# Altium PCB MGMEZZ04.PcbDoc (part 9 of 9)
Units mil, origin at the board's own origin, x right, y up, seen from the top; angles counter-clockwise.
Board outline 3790 x 5472.44 mil, 10 copper layers (TopLayer, InternalPlane1, MidLayer1, InternalPlane2, MidLayer2, MidLayer3, InternalPlane3, MidLayer4, InternalPlane4, BottomLayer), stack 57.08 mil thick; 846 components, 745 nets, 3323 pads, 1906 vias.
Unrouted connection lines stored in the file: 128.
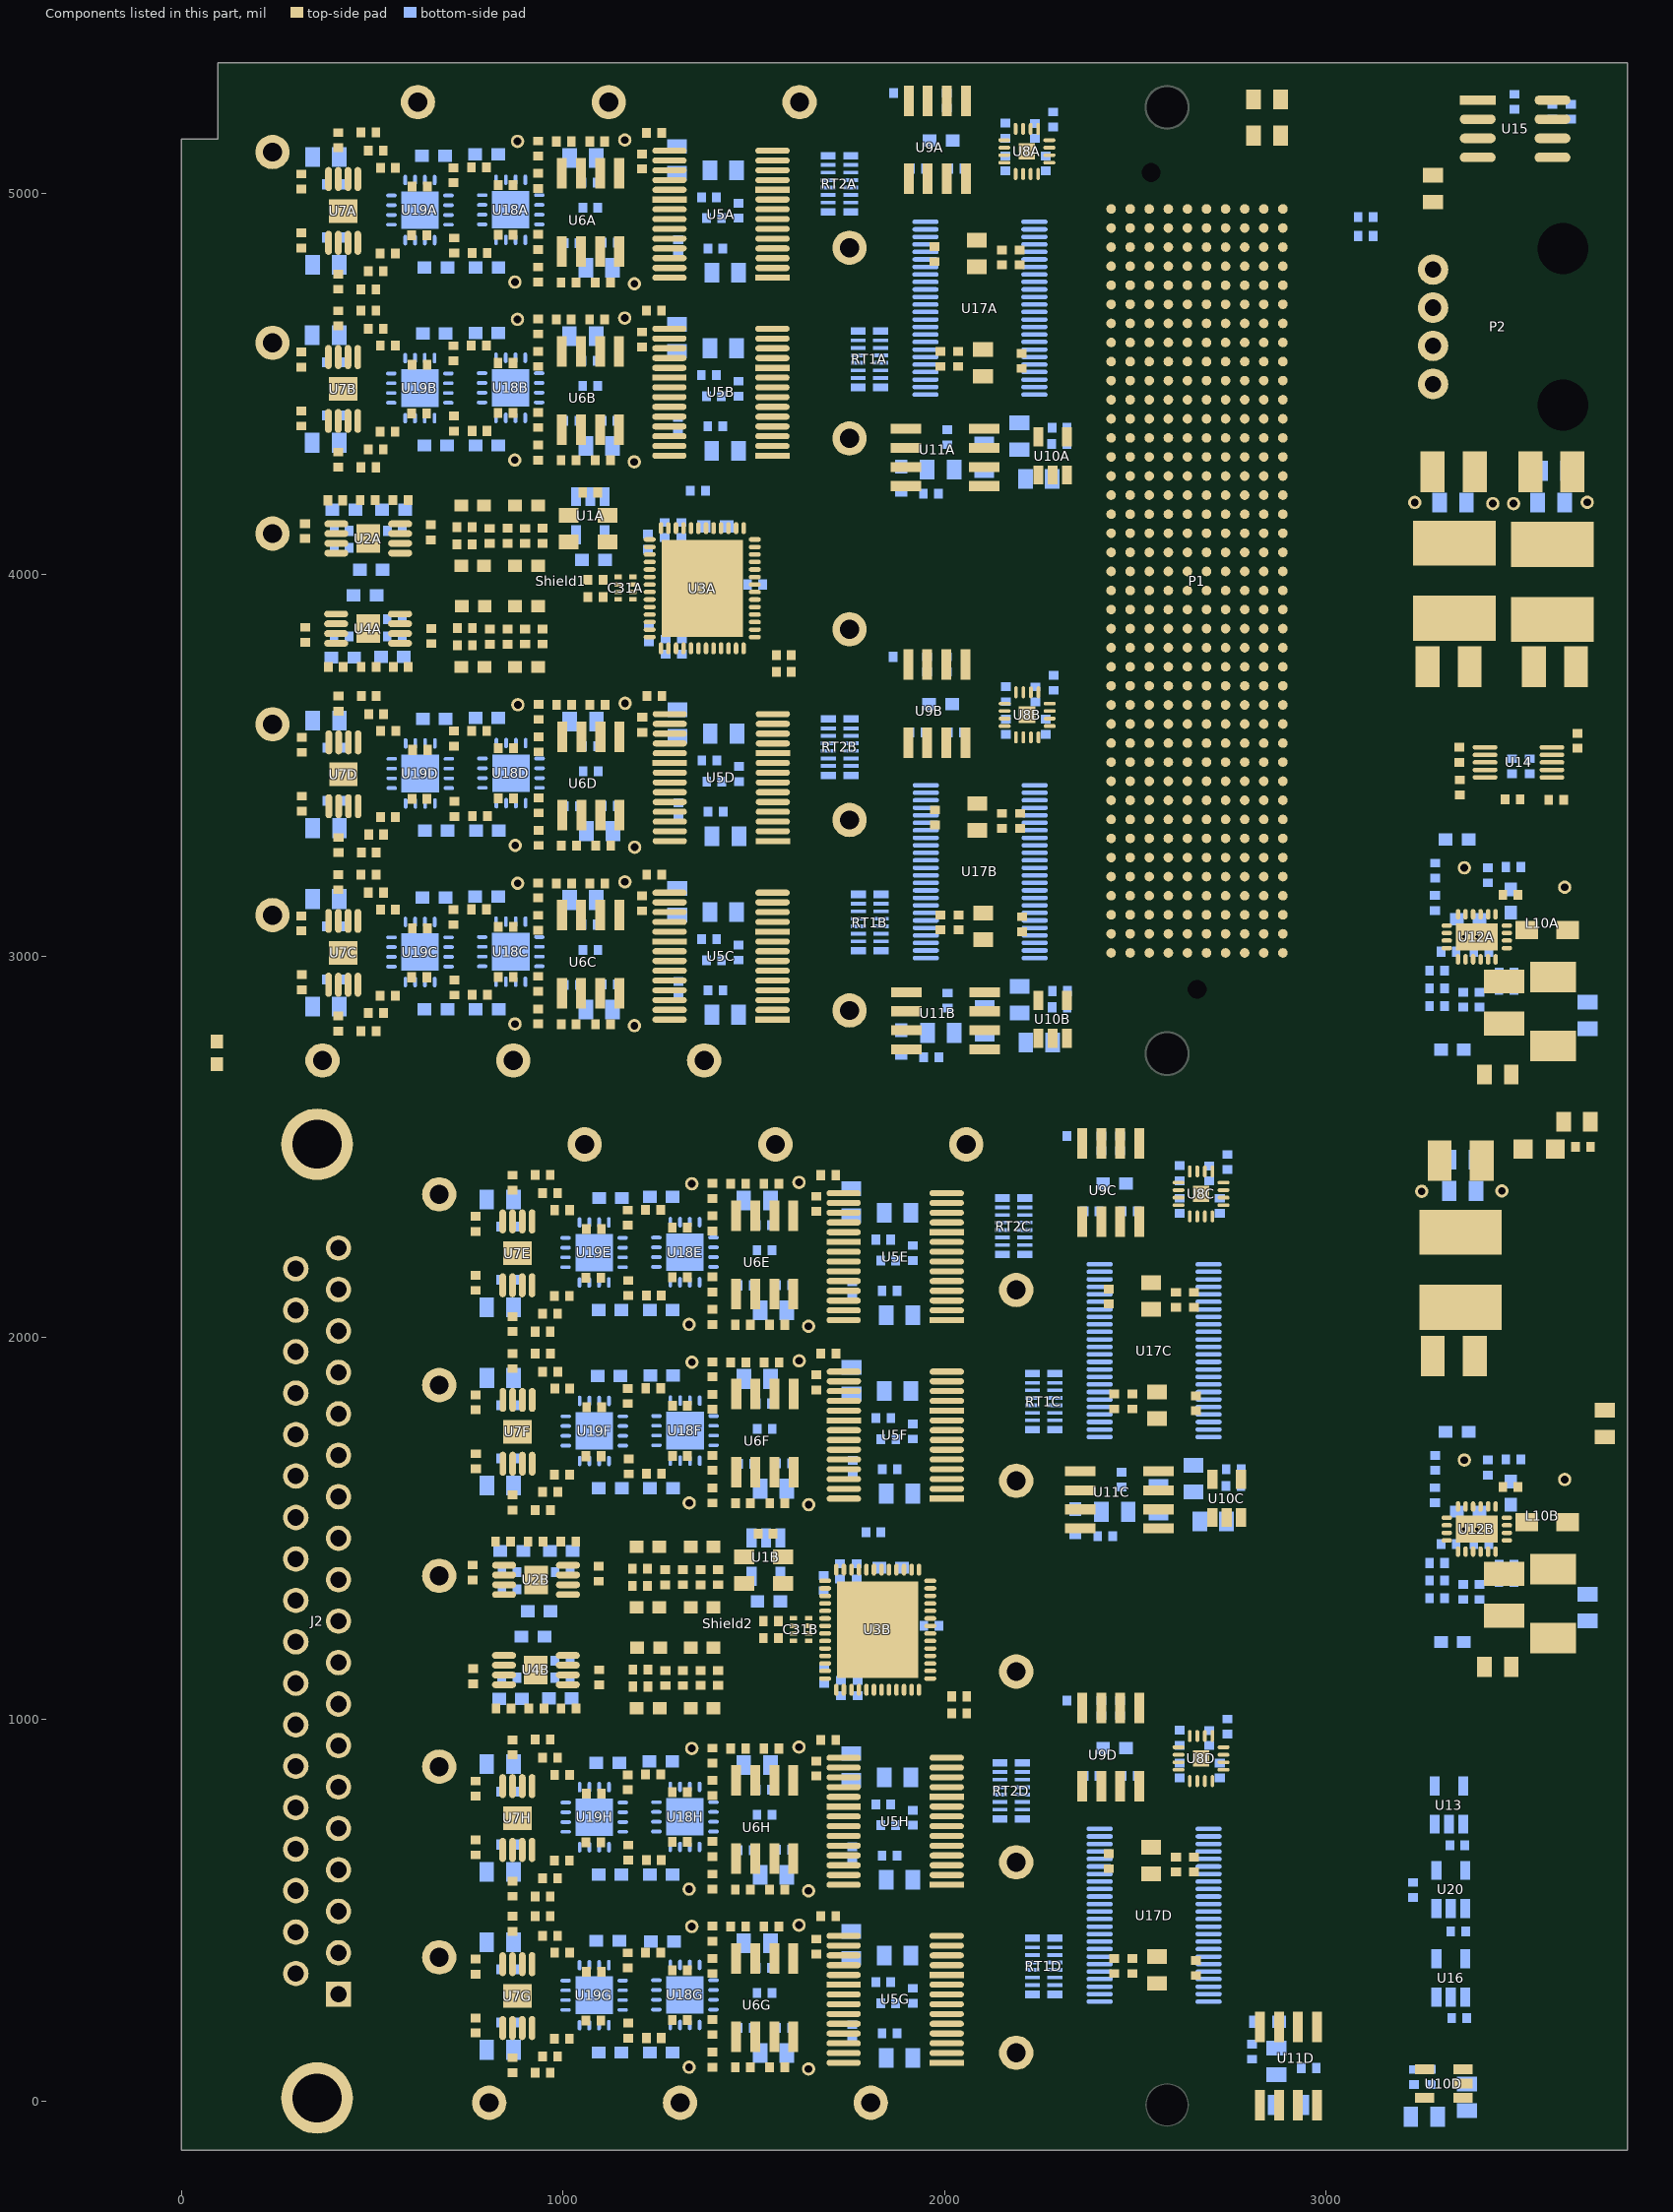
[diagram p17: the components of this part, seen from the top]

## Via types
v1: diameter 18, hole 8, TopLayer to BottomLayer, 1296 vias
v2: diameter 18, hole 8, TopLayer to BottomLayer, tented both sides, 203 vias
v3: diameter 19.68, hole 7.87, TopLayer to BottomLayer, 188 vias
v4: diameter 25, hole 15, TopLayer to BottomLayer, tented both sides, 99 vias
v5: diameter 25, hole 15, TopLayer to BottomLayer, 72 vias
v6: diameter 35, hole 20, TopLayer to BottomLayer, 48 vias

## Nets (pads, with @x,y where several pads share a name; then routed paths per layer and width w, separated by ;. In a path a pad name is that pad's centre, name@x,y a point inside that pad or via, vN(x,y) a via of type N, cw(c..) or ccw(c..) an arc to the next point about the centre after c; other vN are vias at no path point) (continued)
copper on no net: | length 3530.8
  TopLayer w6.5: v2(2411.34,3321.83) 2423.84,3321.83 2436.34,3309.33 ; v2(2411.34,3346.83) 2423.84,3346.83 2436.34,3359.33 ; v2(2411.34,3471.83) 2423.84,3471.83 2436.34,3459.33 ; v2(2411.34,3496.83) 2423.84,3496.83 2436.34,3509.33 ; v2(2411.34,3621.83) 2423.84,3621.83 2436.34,3609.33 ; v2(2411.34,3646.83) 2423.84,3646.83 2436.34,3659.33 ; v2(2411.34,3771.83) 2423.84,3771.83 2436.34,3759.33 ; v2(2411.34,3796.83) 2423.84,3796.83 2436.34,3809.33 ; v2(2411.34,3921.83) 2423.84,3921.83 2436.34,3909.33 ; v2(2411.34,3946.83) 2423.84,3946.83 2436.34,3959.33 ; v2(2411.34,4071.83) 2423.84,4071.83 2436.34,4059.33 ; v2(2411.34,4096.83) 2423.84,4096.83 2436.34,4109.33 ; v2(2411.34,4221.83) 2423.84,4221.83 2436.34,4209.33 ; v2(2411.34,4246.83) 2423.84,4246.83 2436.34,4259.33 ; v2(2411.34,4371.83) 2423.84,4371.83 2436.34,4359.33 ; v2(2411.34,4396.83) 2423.84,4396.83 2436.34,4409.33 ; v2(2411.34,4521.83) 2423.84,4521.83 2436.34,4509.33 ; v2(2411.34,4546.83) 2423.84,4546.83 2436.34,4559.33 ; v2(2411.34,4671.83) 2423.84,4671.83 2436.34,4659.33 ; v2(2411.34,4696.83) 2423.84,4696.83 2436.34,4709.33 ; v2(2411.34,4821.83) 2423.84,4821.83 2436.34,4809.33 ; v2(2411.34,4846.83) 2423.84,4846.83 2436.34,4859.33 ; v2(2461.34,3421.83) 2473.84,3421.83 2486.34,3409.33 ; v2(2461.34,3446.83) 2473.84,3446.83 2486.34,3459.33 ; v2(2461.34,3571.83) 2473.84,3571.83 2486.34,3559.33 ; v2(2461.34,3596.83) 2473.84,3596.83 2486.34,3609.33 ; v2(2461.34,3721.83) 2473.84,3721.83 2486.34,3709.33 ; v2(2461.34,3746.83) 2473.84,3746.83 2486.34,3759.33 ; v2(2461.34,3871.83) 2473.84,3871.83 2486.34,3859.33 ; v2(2461.34,3896.83) 2473.84,3896.83 2486.34,3909.33 ; v2(2461.34,4021.83) 2473.84,4021.83 2486.34,4009.33 ; v2(2461.34,4046.83) 2473.84,4046.83 2486.34,4059.33 ; v2(2461.34,4171.83) 2473.84,4171.83 2486.34,4159.33 ; v2(2461.34,4196.83) 2473.84,4196.83 2486.34,4209.33 ; v2(2461.34,4321.83) 2473.84,4321.83 2486.34,4309.33 ; v2(2461.34,4346.83) 2473.84,4346.83 2486.34,4359.33 ; v2(2461.34,4471.83) 2473.84,4471.83 2486.34,4459.33 ; v2(2461.34,4496.83) 2473.84,4496.83 2486.34,4509.33 ; v2(2461.34,4621.83) 2473.84,4621.83 2486.34,4609.33 ; v2(2461.34,4646.83) 2473.84,4646.83 2486.34,4659.33 ; 2486.34,3259.65 2486.5,3259.49 2498.84,3247.15 v2(2498.84,3234.65) ; v2(2611.34,3171.83) 2623.84,3171.83 2636.34,3159.33 ; v2(2611.34,3196.83) 2623.84,3196.83 2636.34,3209.33 ; v2(2611.34,3321.83) 2623.84,3321.83 2636.34,3309.33 ; v2(2611.34,3346.83) 2623.84,3346.83 2636.34,3359.33 ; v2(2611.34,3471.83) 2623.84,3471.83 2636.34,3459.33 ; v2(2611.34,3496.83) 2623.84,3496.83 2636.34,3509.33 ; v2(2611.34,3621.83) 2623.84,3621.83 2636.34,3609.33 ; v2(2611.34,3646.83) 2623.84,3646.83 2636.34,3659.33 ; v2(2611.34,3771.83) 2623.84,3771.83 2636.34,3759.33 ; v2(2611.34,3796.83) 2623.84,3796.83 2636.34,3809.33 ; v2(2611.34,3921.83) 2623.84,3921.83 2636.34,3909.33 ; v2(2611.34,3946.83) 2623.84,3946.83 2636.34,3959.33 ; v2(2611.34,4071.83) 2623.84,4071.83 2636.34,4059.33 ; v2(2611.34,4096.83) 2623.84,4096.83 2636.34,4109.33 ; v2(2611.34,4221.83) 2623.84,4221.83 2636.34,4209.33 ; v2(2611.34,4246.83) 2623.84,4246.83 2636.34,4259.33 ; v2(2611.34,4371.83) 2623.84,4371.83 2636.34,4359.33 ; v2(2611.34,4396.83) 2623.84,4396.83 2636.34,4409.33 ; v2(2611.34,4521.83) 2623.84,4521.83 2636.34,4509.33 ; v2(2611.34,4546.83) 2623.84,4546.83 2636.34,4559.33 ; v2(2611.34,4671.83) 2623.84,4671.83 2636.34,4659.33 ; v2(2611.34,4696.83) 2623.84,4696.83 2636.34,4709.33 ; v2(2661.34,3071.83) 2673.84,3071.83 2686.34,3059.33 ; v2(2661.34,3096.83) 2673.84,3096.83 2686.34,3109.33 ; v2(2661.34,3271.83) 2673.84,3271.83 2686.34,3259.33 ; v2(2661.34,3296.83) 2673.84,3296.83 2686.34,3309.33 ; v2(2661.34,3421.83) 2673.84,3421.83 2686.34,3409.33 ; v2(2661.34,3446.83) 2673.84,3446.83 2686.34,3459.33 ; v2(2661.34,3571.83) 2673.84,3571.83 2686.34,3559.33 ; v2(2661.34,3596.83) 2673.84,3596.83 2686.34,3609.33 ; v2(2661.34,3721.83) 2673.84,3721.83 2686.34,3709.33 ; v2(2661.34,3746.83) 2673.84,3746.83 2686.34,3759.33 ; v2(2661.34,3871.83) 2673.84,3871.83 2686.34,3859.33 ; v2(2661.34,3896.83) 2673.84,3896.83 2686.34,3909.33 ; v2(2661.34,4021.83) 2673.84,4021.83 2686.34,4009.33 ; v2(2661.34,4046.83) 2673.84,4046.83 2686.34,4059.33 ; v2(2661.34,4171.83) 2673.84,4171.83 2686.34,4159.33 ; v2(2661.34,4196.83) 2673.84,4196.83 2686.34,4209.33 ; v2(2661.34,4321.83) 2673.84,4321.83 2686.34,4309.33 ; v2(2661.34,4346.83) 2673.84,4346.83 2686.34,4359.33 ; v2(2661.34,4471.83) 2673.84,4471.83 2686.34,4459.33 ; v2(2661.34,4496.83) 2673.84,4496.83 2686.34,4509.33 ; v2(2661.34,4621.83) 2673.84,4621.83 2686.34,4609.33 ; v2(2661.34,4646.83) 2673.84,4646.83 2686.34,4659.33 ; v2(2811.34,3571.83) 2823.84,3571.83 2836.34,3559.33 ; v2(2811.34,3596.83) 2823.84,3596.83 2836.34,3609.33 ; v2(2811.34,3771.83) 2823.84,3771.83 2836.34,3759.33 ; v2(2811.34,3796.83) 2823.84,3796.83 2836.34,3809.33 ; v2(2811.34,3971.83) 2823.84,3971.83 2836.34,3959.33 ; v2(2811.34,3996.83) 2823.84,3996.83 2836.34,4009.33 ; v2(2811.34,4371.83) 2823.84,4371.83 2836.34,4359.33 ; v2(2811.34,4396.83) 2823.84,4396.83 2836.34,4409.33 ; v2(2811.34,4571.83) 2823.84,4571.83 2836.34,4559.33 ; v2(2811.34,4596.83) 2823.84,4596.83 2836.34,4609.33 ; v2(2811.34,4771.83) 2823.84,4771.83 2836.34,4759.33 ; v2(2811.34,4796.83) 2823.84,4796.83 2836.34,4809.33 ; v2(2861.34,3071.83) 2873.84,3071.83 2886.34,3059.33 ; v2(2861.34,3096.83) 2873.84,3096.83 2886.34,3109.33 ; v2(2861.34,3271.83) 2873.84,3271.83 2886.34,3259.33 ; v2(2861.34,3296.83) 2873.84,3296.83 2886.34,3309.33 ; v2(2861.34,3471.83) 2873.84,3471.83 2886.34,3459.33 ; v2(2861.34,3496.83) 2873.84,3496.83 2886.34,3509.33 ; v2(2861.34,3671.83) 2873.84,3671.83 2886.34,3659.33 ; v2(2861.34,3696.83) 2873.84,3696.83 2886.34,3709.33 ; v2(2861.34,3871.83) 2873.84,3871.83 2886.34,3859.33 ; v2(2861.34,3896.83) 2873.84,3896.83 2886.34,3909.33 ; v2(2861.34,4071.83) 2873.84,4071.83 2886.34,4059.33 ; v2(2861.34,4096.83) 2873.84,4096.83 2886.34,4109.33 ; v2(2861.34,4271.83) 2873.84,4271.83 2886.34,4259.33 ; v2(2861.34,4296.83) 2873.84,4296.83 2886.34,4309.33 ; v2(2861.34,4471.83) 2873.84,4471.83 2886.34,4459.33 ; v2(2861.34,4496.83) 2873.84,4496.83 2886.34,4509.33 ; v2(2861.34,4671.83) 2873.84,4671.83 2886.34,4659.33 ; v2(2861.34,4696.83) 2873.84,4696.83 2886.34,4709.33 ; v2(2861.34,4871.83) 2873.84,4871.83 2886.34,4859.33 ; v2(2861.34,4896.83) 2873.84,4896.83 2886.34,4909.33
  other v1: 95,4175
  other v2: 2861.34,4171.83 2861.34,4196.83

## Polygon pours and split planes (outlines as drawn)
P1V8B on MidLayer4 "MidLayer4-No Net 1" (solid, pour order 5): 1506.77,1467.18 1506.77,1009.22 1764.69,1009.22 1768.56,1009.22 1789.69,1030.35 1790.82,1029.22 1939.69,1029.22 1966.91,1029.22 2044.69,1107 2039.69,1112 2039.69,1467.18 1507.21,1467.18
P1V8A on MidLayer4 "MidLayer4-No Net 1" (solid, pour order 6): 1047.08,4196.83 1047.08,3738.87 1305,3738.87 1308.87,3738.87 1330,3760 1331.13,3758.87 1480,3758.87 1507.23,3758.87 1585,3836.65 1580,3841.65 1580,4196.83 1047.52,4196.83
VLOWERRAILB on MidLayer1 "MidLayer4-No Net 1" (solid, pour order 7): 3235,1797.62 3710,1797.62 3710,1057.62 3235,1057.62 3235,1797.62
VLOWERRAILA on MidLayer1 "MidLayer4-No Net 1" (solid, pour order 8): 3235,3350 3710,3350 3710,2610 3235,2610 3235,3350
GND on InternalPlane4 (split plane): 3769.9,-109.82 1066.93,-109.82 20.1,-109.82 20.1,5121.9 96,5121.9 99.92,5122.29 103.69,5123.43 107.17,5125.29 110.21,5127.79 112.71,5130.83 114.57,5134.31 115.71,5138.08 116.1,5142 116.1,5322.42 3769.9,5322.42
VDD2B on InternalPlane3 (split plane): 2636.94,1240 2637.17,1238.83 2637.84,1237.84 2861.94,1013.73 2861.94,550 2862.17,548.83 2862.84,547.84 3092.84,317.84 3093.73,316.95 3291.94,118.73 3291.94,-109.82 1066.93,-109.82 20.1,-109.82 20.1,1243.29 2636.94,1243.29
VDD1B on InternalPlane3 (split plane): 2846.94,2514.05 2846.94,1611.27 2786.2,1550.53 2677.47,1550.53 2676.3,1550.29 2675.3,1549.63 2637.84,1512.16 2637.17,1511.17 2636.94,1510 2636.94,1400 2636.94,1249.41 20.1,1249.41 20.1,2646.94 2714.05,2646.94
P5V5FILT on InternalPlane3 (split plane): 3769.9,-109.82 3298.06,-109.82 3298.06,120 3297.83,121.17 3297.16,122.16 3098.05,321.27 3097.16,322.16 2868.06,551.27 2868.06,1015 2867.83,1016.17 2867.16,1017.16 2643.06,1241.27 2643.06,1246.35 2643.06,1400 2643.06,1508.73 2678.73,1544.41 2787.47,1544.41 2788.64,1544.64 2789.63,1545.3 2852.16,1607.84 2852.83,1608.83 2853.06,1610 2853.06,2515.32 2852.83,2516.49 2852.16,2517.48 2717.48,2652.16 2716.49,2652.83 2715.32,2653.06 2178.06,2653.06 2178.06,2770.96 2304.04,2896.94 2375,2896.94 2376.17,2897.17 2377.16,2897.84 2377.83,2898.83 2378.06,2900 2378.06,3680 2377.83,3681.17 2377.16,3682.16 2082.5,3976.83 2081.51,3977.49 2080.34,3977.72 1973.4,3977.72 1973.4,4034.07 2232.25,4292.93 2300.37,4292.93 2301.54,4293.16 2302.53,4293.82 2367.16,4358.45 2367.83,4359.45 2368.06,4360.62 2368.06,5322.42 3769.9,5322.42
VDD1A on InternalPlane3 (split plane): 2361.94,4361.88 2299.1,4299.05 2230.99,4299.05 2229.82,4298.81 2228.82,4298.15 1968.17,4037.5 1967.51,4036.51 1967.28,4035.34 1967.28,3977.72 663.96,3977.72 663.66,3978.16 662.67,3978.83 661.5,3979.06 660.77,3979.06 657.66,3982.16 656.67,3982.83 655.5,3983.06 654.33,3982.83 653.34,3982.16 652.68,3981.17 652.44,3980 652.63,3979.06 20.1,3979.06 20.1,5121.9 96,5121.9 99.92,5122.29 103.69,5123.43 107.17,5125.29 110.21,5127.79 112.71,5130.83 114.57,5134.31 115.71,5138.08 116.1,5142 116.1,5322.42 2361.94,5322.42
VDD2A on InternalPlane3 (split plane): 658.9,3972.28 659.89,3971.62 661.06,3971.38 662.23,3971.62 662.43,3971.75 663.16,3971.6 2079.07,3971.6 2371.94,3678.73 2371.94,2903.06 2302.78,2903.06 2301.61,2902.83 2300.61,2902.16 2172.84,2774.39 2172.17,2773.39 2171.94,2772.22 2171.94,2653.06 20.1,2653.06 20.1,3972.94 658.24,3972.94
VSS2B on InternalPlane2 (split plane): 2546.94,1135.74 2546.94,258.27 2547.17,257.1 2547.84,256.1 2571.1,232.84 2572.1,232.17 2573.27,231.94 2745,231.94 2746.17,232.17 2747.16,232.84 2816.27,301.94 2902.36,301.94 2926.59,277.72 2926.59,220.91 2873.98,168.3 2873.32,167.31 2873.08,166.14 2873.08,68.86 2873.32,67.69 2873.98,66.7 2951.94,-11.27 2951.94,-109.82 1066.93,-109.82 20.1,-109.82 20.1,1243.29 2439.39,1243.29
VSS1B on InternalPlane2 (split plane): 2296.89,2641.17 2298.06,2640.94 2489.73,2640.94 2536.94,2593.73 2536.94,1762.43 2497.57,1723.06 2370.17,1723.06 2368.99,1722.83 2368,1722.16 2337.84,1692 2337.17,1691.01 2336.94,1689.83 2336.94,1610 2337.17,1608.83 2337.84,1607.84 2406.05,1539.63 2406.21,1538.83 2406.87,1537.84 2416.94,1527.76 2416.94,1420 2416.94,1249.41 20.1,1249.41 20.1,2640.94 2295,2640.94 2296.17,2641.17 2296.53,2641.41
N5V5FILT on InternalPlane2 (split plane): 3769.9,-109.82 2958.06,-109.82 2958.06,-10 2957.83,-8.83 2957.16,-7.84 2879.2,70.12 2879.2,164.87 2931.81,217.48 2932.47,218.48 2932.71,219.65 2932.71,278.98 2932.47,280.15 2931.81,281.15 2905.79,307.16 2904.8,307.83 2903.63,308.06 2815,308.06 2813.83,307.83 2812.84,307.16 2743.73,238.06 2574.53,238.06 2553.06,259.53 2553.06,1137.01 2552.83,1138.18 2552.16,1139.17 2442.82,1248.52 2441.83,1249.18 2440.66,1249.41 2423.06,1249.41 2423.06,1420 2423.06,1529.03 2422.83,1530.2 2422.16,1531.19 2412.02,1541.34 2411.86,1542.14 2411.19,1543.13 2343.06,1611.27 2343.06,1688.57 2371.43,1716.94 2498.84,1716.94 2500.01,1717.17 2501,1717.84 2542.16,1759 2542.83,1759.99 2543.06,1761.16 2543.06,2595 2542.83,2596.17 2542.16,2597.16 2493.16,2646.16 2492.17,2646.83 2491,2647.06 2298.06,2647.06 2296.89,2646.83 2296.53,2646.59 2296.17,2646.83 2295,2647.06 1943.06,2647.06 1943.06,2819.9 1946,2822.84 1946.66,2823.83 1946.89,2825 1946.66,2826.17 1946,2827.16 1945,2827.83 1943.83,2828.06 1911.27,2828.06 1888.06,2851.27 1888.06,2956.94 2018.53,2956.94 2019.7,2957.17 2020.7,2957.84 2026.35,2963.49 2027.01,2964.48 2027.24,2965.65 2027.24,3487.57 2027.24,3487.92 2096.67,3557.34 2097.33,3558.33 2097.56,3559.5 2097.56,3850.5 2097.33,3851.67 2096.67,3852.66 1971.05,3978.27 2023.52,4030.74 2024.19,4031.74 2024.42,4032.91 2024.42,4239.46 2024.19,4240.63 2023.52,4241.62 1956.04,4309.1 1955.04,4309.77 1953.87,4310 1935.31,4310 1933.15,4312.16 1932.16,4312.83 1930.99,4313.06 1896.27,4313.06 1838.06,4371.27 1838.06,4418.73 1864.94,4445.61 2032.15,4445.61 2033.33,4445.84 2034.32,4446.51 2072.56,4484.75 2073.23,4485.75 2073.46,4486.92 2073.46,5322.42 3769.9,5322.42
VSS1A on InternalPlane2 (split plane): 2067.34,4488.18 2030.89,4451.73 1863.67,4451.73 1862.5,4451.5 1861.51,4450.83 1832.84,4422.16 1832.17,4421.17 1831.94,4420 1831.94,4370 1832.17,4368.83 1832.84,4367.84 1892.84,4307.84 1893.83,4307.17 1895,4306.94 1926.66,4306.94 1926.89,4305.77 1927.56,4304.78 1928.55,4304.12 1929.72,4303.88 1932.78,4303.88 1942.84,4293.82 1943.83,4293.16 1945,4292.93 1946.17,4293.16 1947.16,4293.82 1947.83,4294.82 1948.06,4295.99 1947.83,4297.16 1947.16,4298.15 1941.43,4303.88 1952.61,4303.88 2018.3,4238.19 2018.3,4034.17 1963.18,3979.06 20.1,3979.06 20.1,5121.9 96,5121.9 99.92,5122.29 103.69,5123.43 107.17,5125.29 110.21,5127.79 112.71,5130.83 114.57,5134.31 115.71,5138.08 116.1,5142 116.1,5322.42 2067.34,5322.42
VSS2A on InternalPlane2 (split plane): 2091.45,3849.23 2091.45,3560.77 2022.02,3491.35 2021.36,3490.36 2021.13,3489.19 2021.13,3488.43 2021.13,3487.57 2021.13,3485 2021.13,2966.92 2017.27,2963.06 1885,2963.06 1883.83,2962.83 1882.84,2962.16 1882.17,2961.17 1881.94,2960 1881.94,2850 1882.17,2848.83 1882.84,2847.84 1907.84,2822.84 1908.83,2822.17 1910,2821.94 1937.1,2821.94 1936.94,2821.17 1936.94,2647.06 20.1,2647.06 20.1,3972.94 1964.45,3972.94 1965.62,3973.17 1966.61,3973.84 1966.73,3973.95
GND on InternalPlane1 (split plane): 3769.9,-109.82 1066.93,-109.82 20.1,-109.82 20.1,5121.9 96,5121.9 99.92,5122.29 103.69,5123.43 107.17,5125.29 110.21,5127.79 112.71,5130.83 114.57,5134.31 115.71,5138.08 116.1,5142 116.1,5322.42 3769.9,5322.42

## Keep-outs
TopLayer:
  region: 2582.68,5110.24 cw(c2582.68,5224.41) 2468.5,5224.41 cw(c2582.68,5224.41) 2582.68,5338.58 cw(c2582.68,5224.41) 2696.85,5224.41 cw(c2582.68,5224.41)
  region: 2582.68,-125.98 cw(c2582.68,-11.81) 2468.5,-11.81 cw(c2582.68,-11.81) 2582.68,102.36 cw(c2582.68,-11.81) 2696.85,-11.81 cw(c2582.68,-11.81)
  region: 2582.68,2629.92 cw(c2582.68,2744.09) 2468.5,2744.09 cw(c2582.68,2744.09) 2582.68,2858.27 cw(c2582.68,2744.09) 2696.85,2744.09 cw(c2582.68,2744.09)

## Other copper
TopLayer:
  region net NetC56B_1: 3523,1395.63 3523,1458 3418.99,1458 3418.99,1395.63
  rectangle net NetC57B_1: 3462.99,1502.26 3520,1540.3
  rectangle net NetC57A_1: 3462.99,3054.64 3520,3092.68
  region net NetC56A_1: 3525.99,2948.01 3525.99,3009.02 3418.99,3009.02 3418.99,2948.01
  region net NetC31A_4: 1168.11,3961.05 1169.11,3963.05 1174.11,3958.05 1174.11,3953.05 1169.11,3948.05 1168.11,3950.05
  region net NetC31A_2: 1116.11,3974.05 1119.11,3971.05 1125.11,3963.05 1125.11,3986.05 1126.11,3986.05 1129.17,3988.05 1135.11,3989.05 1135.11,4000.05 1116.11,4000.05
  region net NetC31A_4: 1135.11,3930.05 1116.11,3930.05 1116.11,3954.05 1128.11,3941.05 1135.11,3941.05
  text "L1 (TOP) .GTL" at -1680,3894 h100
MidLayer1:
  text "L3 (ML1) .G1" at -1680,3344 h100
MidLayer2:
  text "L5 (ML2) .G2" at -1680,2764 h100
MidLayer3:
  text "L6 (ML3) .G3" at -1680,2464 h100
MidLayer4:
  text "L8 (ML4) .G4" at -1680,1824 h100
BottomLayer:
  text "L10 (BOT) .GBL" at -640,1174 h100
InternalPlane1 (plane layer: these items are gaps in the copper):
  lines w6: 274.75,4253.34 1643.75,4253.34 ; 275,3243 1644,3243 ; 275,3710 1644,3710 ; 275,3989.31 1644,3989.31 ; 275,4720 1644,4720 ; 275.2,2775.37 1644.2,2775.37 ; 278,5192 1647,5192 ; 728.82,991 2097.82,991 ; 729,2455 2098,2455 ; 731.5,44.98 2100.5,44.98 ; 731.5,507.69 2100.5,507.69 ; 731.5,1987.69 2100.5,1987.69 ; 731.89,1519.98 2100.89,1519.98
  text "L2 (GND) .GP1" at -1680,3704 h100
  text "GND" at -1430,3534 h100
InternalPlane2 (plane layer: these items are gaps in the copper):
  lines w6: 1,1246.35 1121.52,1246.35 ; 15,2644 2015,2644 2295,2644 ; 15,3976 661.5,3976 ; 275,3710 1644,3710 ; 275,4255 1644,4255 ; 275,4720 1644,4720 ; 275.2,2775.37 1644.2,2775.37 ; 275.81,3243.34 1644.81,3243.34 ; 278,5192 1647,5192 ; 645,3976 1964.45,3976 2021.36,4032.91 2021.36,4239.46 1953.87,4306.94 1929.72,4306.94 ; 728,2455 2097,2455 ; 728.82,991 2097.82,991 ; 730,1520 2099,1520 ; 731.5,44.98 2100.5,44.98 ; 731.5,507.69 2100.5,507.69 ; 731.5,1987.69 2100.5,1987.69 ; 1110,1246.35 2420,1246.35 ; 1940,2644 1940,2821.17 1943.83,2825 1910,2825 1885,2850 1885,2960 1920,2960 2018.53,2960 2024.19,2965.65 2024.19,3487.57 2024.19,3488.43 ; 1945,4220 1945,4230 ; 1945,4295.99 1930.99,4310 1895,4310 1835,4370 1835,4420 1863.67,4448.67 2032.15,4448.67 2070.4,4486.92 2070.4,5339.9 ; 1968.26,3976.74 2094.5,3850.5 2094.5,3559.5 2024.19,3489.19 2024.19,3485 ; 2295,1547.47 2302.47,1540 ; 2298.06,2644 2491,2644 2540,2595 2540,1761.16 2498.84,1720 2370.17,1720 2340,1689.83 2340,1610 2409.03,1540.97 2409.03,1540 2420,1529.03 2420,1420 2420,1246.35 ; 2955,-129.92 2955,-10 2876.14,68.86 2876.14,166.14 2929.65,219.65 2929.65,278.98 2903.63,305 2890,305 2815,305 2745,235 2573.27,235 2550,258.27 2550,1137.01 2440.66,1246.35 2420,1246.35
  text "L4 (PWR) .GP2" at -1680,3144 h100
  text "-5V5 & -5V" at -1440,2954 h100
InternalPlane3 (plane layer: these items are gaps in the copper):
  lines w6: 1,1246.35 2629.35,1246.35 ; 15,2650 2295,2650 ; 15,3976 661.5,3976 ; 274,5192 1643,5192 ; 274.75,4253.34 1643.75,4253.34 ; 275,3710 1644,3710 ; 275,4720 1644,4720 ; 275.2,2775.37 1644.2,2775.37 ; 275.81,3243.34 1644.81,3243.34 ; 655.5,3980 661.06,3974.44 ; 663.16,3974.66 1970.34,3974.66 ; 728.82,991 2097.82,991 ; 728.82,1987 2097.82,1987 ; 730,2455 2099,2455 ; 731.5,44.98 2100.5,44.98 ; 731.5,507.69 2100.5,507.69 ; 731.89,1519.98 2100.89,1519.98 ; 2175,2650 2175,2772.22 2302.78,2900 2375,2900 2375,3680 2080.34,3974.66 1970.34,3974.66 ; 2280,2650 2715.32,2650 2850,2515.32 2850,1610 2787.47,1547.47 2677.47,1547.47 2640,1510 2640,1400 2640,1246.35 ; 2365,5342.52 2365,4360.62 2300.37,4295.99 2230.99,4295.99 1970.34,4035.34 1970.34,3974.66 ; 2580,1246.35 2640,1246.35 ; 3295,-129.92 3295,120 3095.89,319.11 3095,320 2865,550 2865,1015 2640,1240 2640,1246.35
  text "5V5 & 5V" at -1550,2234 h100
  text "L7 (PWR) .GP3" at -1680,2034 h100
InternalPlane4 (plane layer: these items are gaps in the copper):
  lines w6: 274.75,4253.34 1643.75,4253.34 ; 275,3243 1644,3243 ; 275,3710 1644,3710 ; 275,4720 1644,4720 ; 275.2,2775.37 1644.2,2775.37 ; 278,5192 1647,5192 ; 728.82,508 2097.82,508 ; 728.82,991 2097.82,991 ; 728.82,1987 2097.82,1987 ; 729,2455 2098,2455 ; 731.5,44.98 2100.5,44.98 ; 731.89,1519.98 2100.89,1519.98
  text "FMC GND" at -1490,1594 h100
  text "L9 (GND) .GP4" at -1680,1414 h100

## Silkscreen, mask and mechanical layers (free items; w line width, h text height)
Outline:
  lines w3.94: 0,5142 0,-129.92 1066.93,-129.92 3011.81,-129.92 3790,-129.92 3790,5342.52 96,5342.52
  lines w4: 0,5142 96,5142 96,5342.52
Mechanical3:
  lines w4: 3052,-893 3052,5285 ; 3152,-893 3152,5285
Mechanical15:
  text "Board Support" at 3170,-2750 h200 r90
DrillDrawing:
  lines w5: 4374.07,3398.44 6224.46,3398.44
  lines w20: 4402.14,2736.27 4913.95,2736.27 ; 4413.44,3319.7 5003.99,3319.7 ; 4417.71,1431.84 5008.26,1431.84 ; 4420.92,1973.25 4932.73,1973.25 ; 4437.81,2496.09 4949.62,2496.09 ; 4437.81,2934.09 4949.62,2934.09 ; 4452.81,3131.59 4964.62,3131.59 ; 4462.08,1772.33 4973.89,1772.33 ; 4462.81,2211.09 4974.62,2211.09 ; 4463.71,1606.8 4975.52,1606.8
  text ".Legend" at -1542,4163 h100
  text "370HR: 10 Layer PCB, Approximate Build:" at 4186.25,3468.75 h60
  text "L1" at 3886.25,3288.75 h80
  text "TopLayer 1/2 Oz + Plating" at 5043.36,3280.33 h60
  text ".GTL" at 6566.25,3268.75 h60
  text "4.15 mils spacing" at 4141.21,3210.94 h60
  text "L2" at 3886.25,3108.75 h80
  text ".GP1" at 6566.25,3108.75 h60
  text "Plane 1  1/2 Oz" at 5031.19,3106.29 h60
  text "6 mils spacing" at 4128.71,3005.94 h60
  text "L3" at 3886.25,2908.75 h80
  text "MidLayer1 1/2 Oz" at 4987.9,2901.62 h60
  text ".G1" at 6546.25,2888.75 h60
  text "5.83 mils spacing" at 4136.25,2805.75 h60
  text "Plane 2   1/2 Oz" at 5001.19,2723.29 h60
  text "L4" at 3899,2713 h80
  text ".GP2" at 6496.25,2685.75 h60
  text "6 mils spacing" at 4133.71,2592.94 h60
  text "L5" at 3896.5,2490.5 h80
  text "MidLayer2  1/2 Oz" at 5006.25,2470.75 h60
  text ".G2" at 6546.25,2450.75 h60
  text "4.72  excess spacing" at 4179,2320.5 h60
  text "MidLayer3  1/2 Oz" at 5012.9,2178.62 h60
  text ".G3" at 6571.25,2165.75 h60
  text "L6" at 3904,2160.5 h80
  text "6 mils spacing" at 4108.71,2072.94 h60
  text "L7" at 3914,1945.5 h80
  text ".GP3" at 6501.25,1925.75 h60
  text "Plane 3    1/2 Oz" at 5006.19,1923.29 h60
  text "5.83 mils spacing" at 4123.71,1862.94 h60
  text "L8" at 3911.25,1783.75 h80
  text ".G4" at 6551.25,1743.75 h60
  text "MidLayer4  1/2 Oz" at 5032.9,1736.62 h60
  text "6 mils spacing" at 4131.23,1683.84 h60
  text "L9" at 3891.25,1583.75 h80
  text ".GP4" at 6531.25,1563.75 h60
  text "Plane 4    1/2 Oz" at 5036.19,1561.29 h60
  text "4.15 mils spacing" at 4144.03,1488.02 h60
  text "L10" at 3891.25,1403.75 h80
  text "Bottom  1/2 Oz + Plating" at 5048.36,1395.33 h60
  text ".GBL" at 6551.25,1363.75 h60
  text "Total thickness = .062\"" at 4122.65,1216.83 h60
  text "OUTSIDE ROUTED LAYERS:" at 4006.25,983.75 h60
  text "INNER SIGNAL LAYERS 3 & 8:" at 5384,980.5 h60
  text "6.5 mils = 50 OHMS" at 4126.5,860.5 h60
  text "4.5 mils = 50 OHMS" at 5524,830.5 h60
  text "4.5/6.5/4.5 = 100 Diff" at 3941.5,758 h60
  text "4/8/4 = 100 Diff" at 5674,708 h60
  text "INNER SIGNAL LAYERS 5 & 6:" at 5379,500.5 h60
  text "6.5 mils = 50 OHMS" at 5501.5,383 h60
  text "5/7/5 = 100 Diff" at 5649,263 h60
  text "FINISHED HOLE SIZES" at 4620,107 h100
  text "DRILL DRAWING (.GD1)" at 4071,-278.5 h100
  text "4.72  excess spacing" at 4629,-925.5 h60

## Dimensions
3.09,5342.52 to 3790,5342.52 on Dimensions
0,-129.92 to 3.09,5113.58 on Dimensions
3011.81,5342.52 to 3011.81,-129.92 on Dimensions

## Text inside footprints (layer, text, board x,y; h text height)
J2: TopOverlay "37" at 177.76,2131.81 h40 r90; TopOverlay "20" at 177.76,289.52 h40 r90; TopOverlay "19" at 551.77,2191.08 h40 r90; TopOverlay "1" at 551.77,269.62 h40 r90